# EAGLE board DIT633-wp3-ex2 (EAGLE 9.7.0)

Size 170.14 x 108.41 mm. Coordinates in mm from the lower left corner, seen from the top.
Outline: 0,0 170.14,0 170.14,108.41 0,108.41 0,0
Copper layers (1*16): Top 0.035mm / dielectric 1.5mm / Bottom 0.035mm
Design rules "default": minimum track width 6mil, minimum drill 0.35mm, track to track 6mil, track to pad 6mil, pad to pad 6mil, via to via 6mil, smd to smd 6mil, copper to edge 40mil, drill to drill 6mil, minimum pad ring 10mil, minimum via ring 8mil, stop-mask expansion 4mil, vias tented up to drill 0mil, thermal gap 10mil

## Footprints (pad centres in the part's own frame; a part is rotated, then mirrored left to right if it is on the bottom)
LEDRD254W60D565H860B_G = drill 0.981 pad 1.581: 1 -1.27,0; 2 1.27,0
LEDRD254W60D565H860B = drill 0.981 pad 1.581: 1 -1.27,0; 2 1.27,0
LEDRD254W60D565H860B_B = drill 0.981 pad 1.581: 1 -1.27,0; 2 1.27,0
SENRD254W50D503H320B = drill 0.7 pad 1.3: 1 -1.27,0; 2 1.27,0
RESAD1016W63L850D250B = drill 0.83 pad 1.43: 1 -5.08,0; 2 5.08,0
ARDUINO-UNO-R3-SHIELD = drill 1.016 pad 1.88: 3.3V 24.13,-2.54; 5V 24.13,0; A0 24.13,12.7; A1 24.13,15.24; A2 24.13,17.78; A3 24.13,20.32; A4 24.13,22.86; A5 24.13,25.4; AREF -24.13,-13.97; D2 -24.13,20.32; D3 -24.13,17.78; D4 -24.13,15.24; D5 -24.13,12.7; D6 -24.13,10.16; D7 -24.13,7.62; D8 -24.13,3.81; D9 -24.13,1.27; D10 -24.13,-1.27; D11 -24.13,-3.81; D12 -24.13,-6.35; D13 -24.13,-8.89; GND@0 24.13,2.54; GND@1 24.13,5.08; GND@2 -24.13,-11.43; IOREF 24.13,-7.62; NC 24.13,-10.16; RES 24.13,-5.08; RX -24.13,25.4; SCL -24.13,-19.05; SDA -24.13,-16.51; TX -24.13,22.86; VIN 24.13,7.62
TO92 = drill 0.813 octagon: 1 -1.27,0; 2 0,1.905; 3 1.27,0

## Placement (x,y rotation side)
D1  GREEN  [LEDRD254W60D565H860B_G]  153.92,39.45 180 top
D2  RED  [LEDRD254W60D565H860B]  159,39.45 180 top
D3  BLUE  [LEDRD254W60D565H860B_B]  164.08,39.45 180 top
Q1  PHOTOTRANSISTOR  [SENRD254W50D503H320B]  120.9,19.13 180 top
R1  220  [RESAD1016W63L850D250B]  152.65,26.75 90 top
R2  5k  [RESAD1016W63L850D250B]  119.63,8.97 90 top
R3  220  [RESAD1016W63L850D250B]  157.73,26.75 90 top
R4  220  [RESAD1016W63L850D250B]  162.81,26.75 90 top
U2  ARDUINO-UNO-R3-SHIELD  [ARDUINO-UNO-R3-SHIELD]  47.88,78.56 270 top
U3  TMP36GT9Z_TO92  [TO92]  121.77,53.3 0 top

## Library data of the parts
D1 = Tinkercad; CATEGORY: Opto-Electronic; SUB-CATEGORY: LED; VALUE: LED_GREEN
D2 = Tinkercad; CATEGORY: Opto-Electronic; SUB-CATEGORY: LED; VALUE: LED_RED
D3 = Tinkercad; CATEGORY: Opto-Electronic; SUB-CATEGORY: LED; VALUE: LED_BLUE
Q1 R1-R4 U2 U3 = Tinkercad

## Nets
D1_C: D1.2 R1.2
D2_C: D2.2 R3.2
D3_C: D3.2 R4.2
U2_5V: Q1.1 U2.5V U3.3
U2_A0: U2.A0 U3.2
U2_A1: Q1.2 R2.2 U2.A1
U2_D2: D3.1 U2.D2
U2_D4: D2.1 U2.D4
U2_D7: D1.1 U2.D7
U2_GND: R1.1 R2.1 R3.1 R4.1 U2.GND@0 U2.GND@1 U2.GND@2 U3.1

## Tracks (layer width: path | path; a pad name or v marks a point on that pad's centre or on a via)
D1_C  (1 unrouted)
D2_C  (1 unrouted)
D3_C  (1 unrouted)
U2_5V  (2 unrouted)
U2_A0  (1 unrouted)
U2_A1  (2 unrouted)
U2_D2  (1 unrouted)
U2_D4  (1 unrouted)
U2_D7  (1 unrouted)
U2_GND  (7 unrouted)